# Altium PCB dual_tone.PcbDoc
Units mm, origin at the board's own origin, x right, y up, seen from the top; angles counter-clockwise.
Board outline 63 x 36.01 mm, 2 copper layers (Top Layer, Bottom Layer); 26 components, 14 nets, 61 pads, 0 vias.
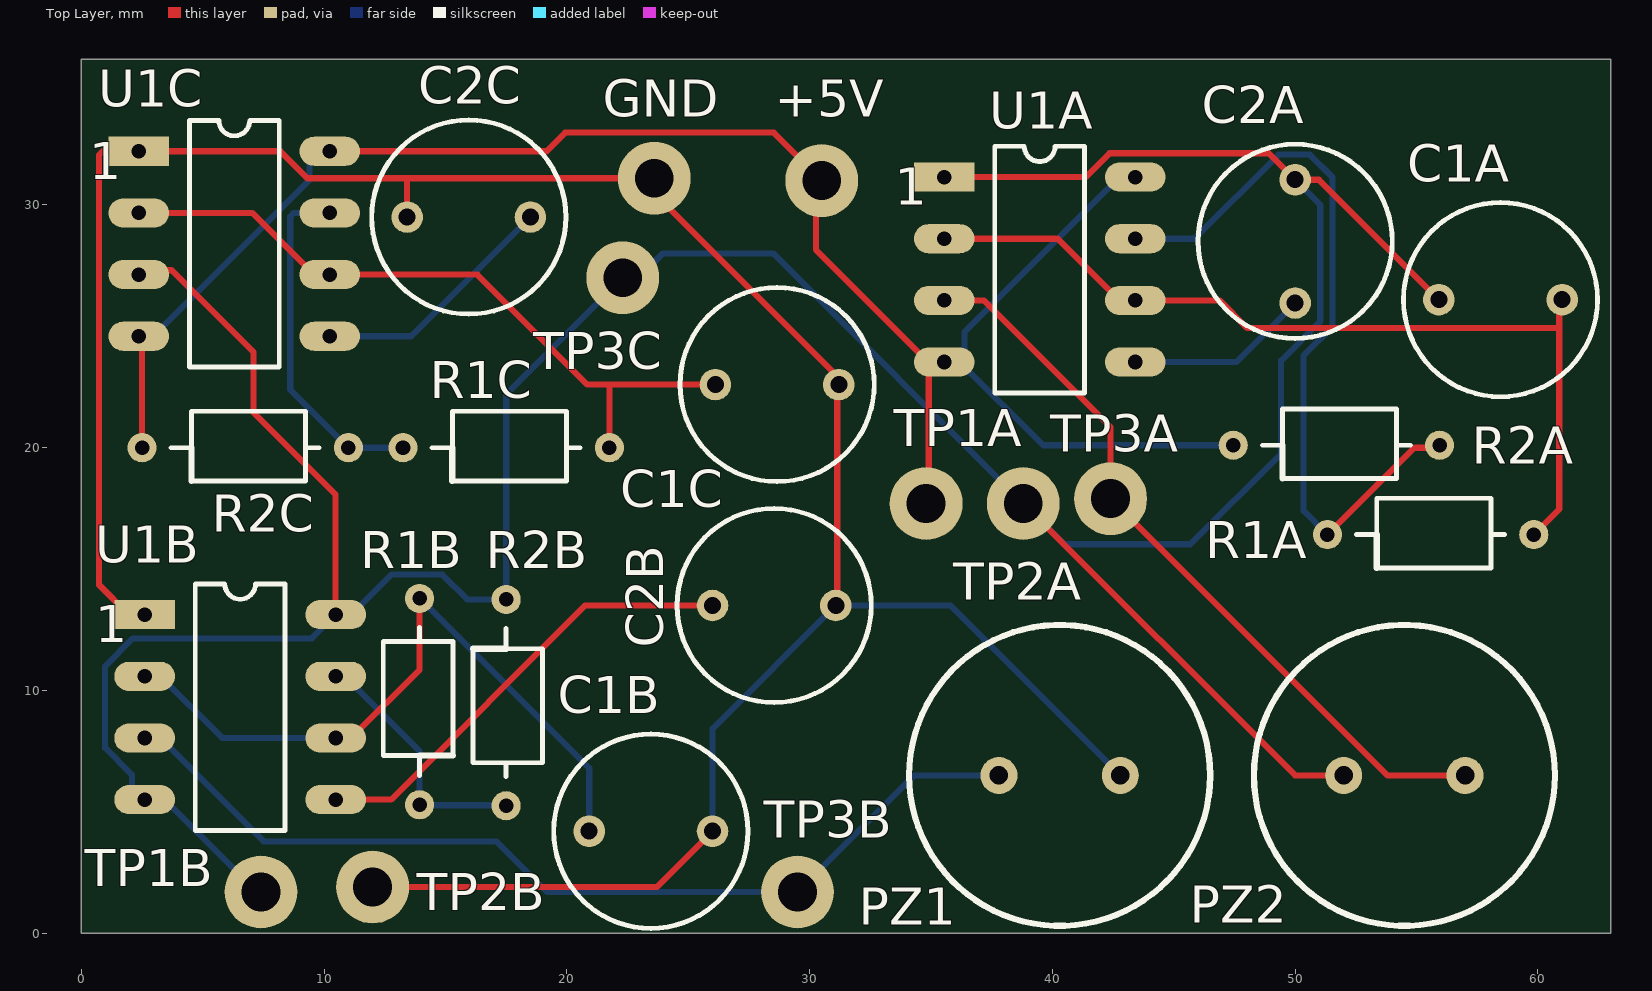
[diagram p0: Top Layer view]
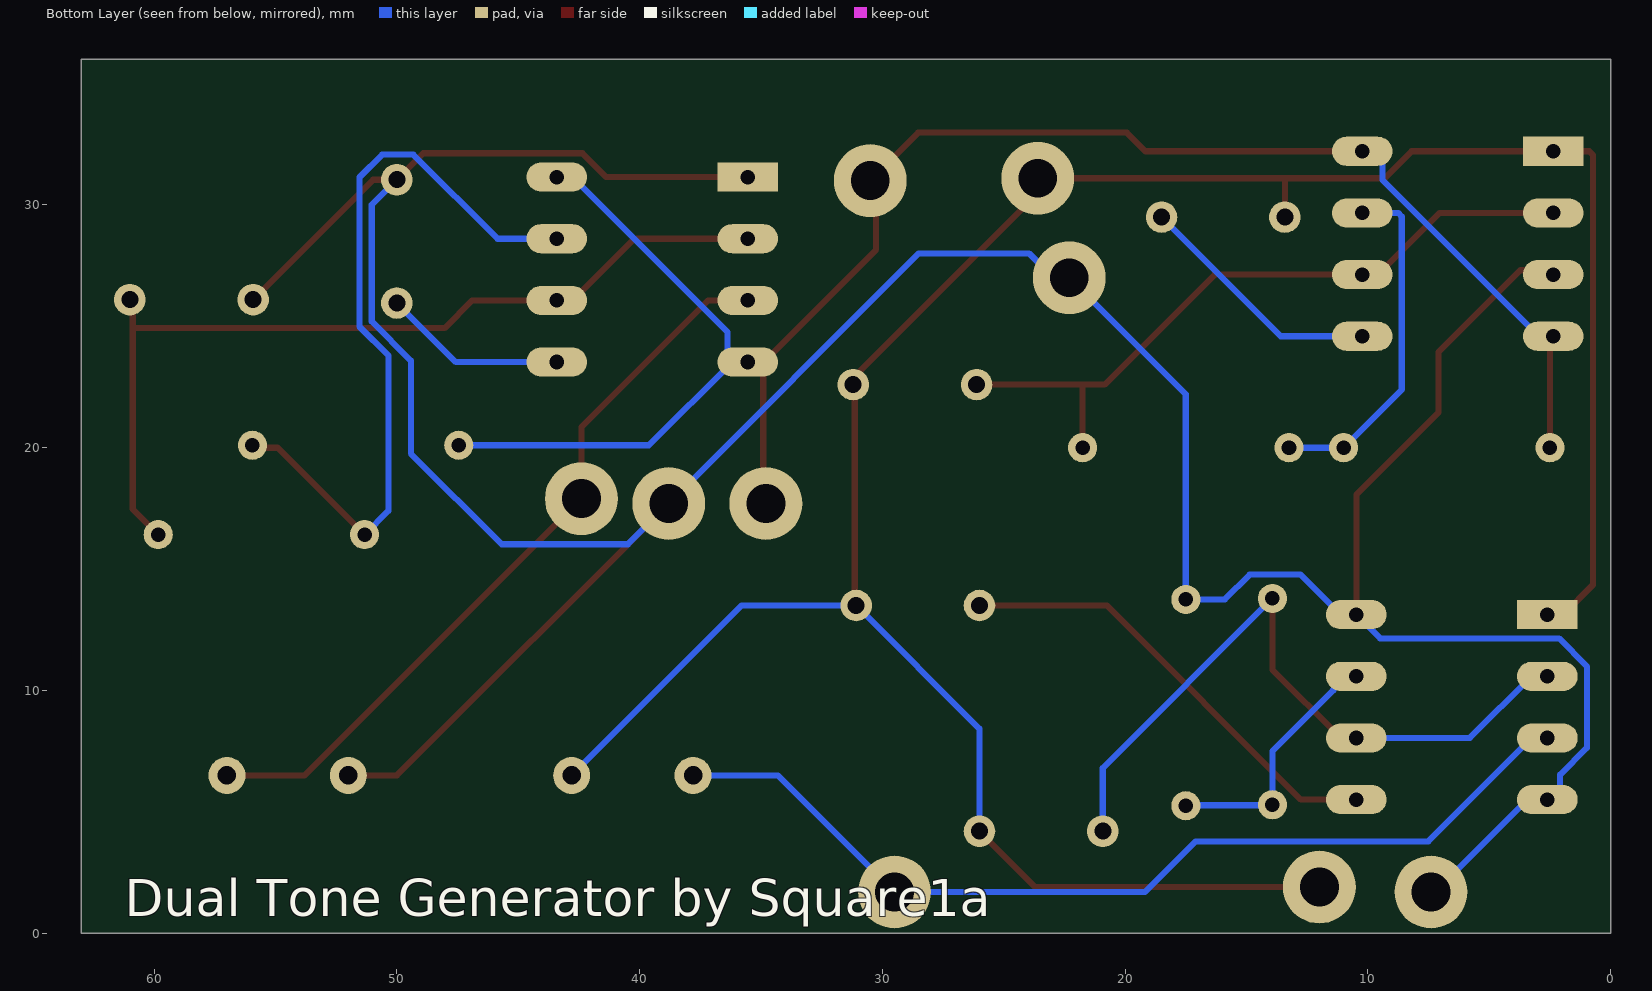
[diagram p1: Bottom Layer view, seen from below]

## Layer stack, top to bottom
Top Solder: solder mask 0.0102, Solder Resist, Dk 3.5
Top Layer: signal copper 0.0356
Dielectric 1: dielectric 0.32, FR-4, Dk 4.8
Bottom Layer: signal copper 0.0356
Bottom Solder: solder mask 0.0102, Solder Resist, Dk 3.5

## Board outline
-0.003,-0.01 63,-0.01 63,36 -0.003,36

## Design rules (kind name [scope] priority, off if disabled: settings)
Clearance [All] p1: gap=0.254 ignorepadtopadclearanceinfootprint=FALSE except(0: Arc-Hole Track-Hole SMDPad-Hole THPad-Hole Via-Hole Fill-Hole Poly-Hole Region-Hole Text-Hole)
HoleSize [All] p1: absolutevalues=TRUE maxlimit=2.54 minlimit=0.3 maxpercent=80.000 minpercent=20.000
PolygonConnect [All] p1: connectstyle=Relief reliefconductorwidth=0.254 reliefentries=4 polygonreliefangle="90 Angle" airgapwidth=0.254
RoomDefinition "U_555 timer2" [InComponentClass('U_555 timer2')] p1: confinementstyle=ConfineIn formatcopy=TRUE lockcomponents=FALSE outline 0.3,0 33,0 33,18 0.3,18
RoomDefinition "U_555 timer1" [InComponentClass('U_555 timer1')] p2: confinementstyle=ConfineIn formatcopy=TRUE lockcomponents=FALSE outline 33.081,14.341 63,14.341 63,35.9 33.081,35.9
RoomDefinition "U_555 timer3" [InComponentClass('U_555 timer3')] p3: confinementstyle=ConfineIn formatcopy=TRUE lockcomponents=FALSE outline 0,18 32.922,18 32.922,35.9 0,35.9
RoomDefinition Dual_tone_generator [InComponentClass('Dual_tone_generator')] p4: confinementstyle=ConfineIn formatcopy=TRUE lockcomponents=FALSE outline 33,0 63,0 63,14.5 33,14.5
RoutingVias [All] p1: holewidth=0.711 width=1.27 viastyle="Through Hole" minholewidth=0.711 minwidth=1.27 maxholewidth=0.711 maxwidth=1.27
SolderMaskExpansion [All] p1: expansion=0.102 istentingtop=FALSE
Width [All] p1: maxlimit=0.254 minlimit=0.254 preferedwidth=0.254
29 further rules are at their usual default settings.

## Classes and differential pairs
channel class 555_Timer: "U_555 timer1" "U_555 timer2" "U_555 timer3"
component class "U_555 timer3": +5V C1C C2C GND R1C R2C TP3C U1C
component class "U_555 timer2": C1B C2B R1B R2B TP1B TP2B TP3B U1B
component class "U_555 timer1": C1A C2A R1A R2A TP1A TP2A TP3A U1A
component class Dual_tone_generator: PZ1 PZ2

## Components (designator, comment, footprint, x,y, rotation, side; value= is the part's Value field where it differs from the comment)
+5V "(POS)" TEST_POINT 30.5,31 r0 top (schematic designator TP1)
C1A "10nF" CAPACITOR 58.46,26.1 r0 top (schematic designator C1)
C1B "10nF" CAPACITOR 23.46,4.2 r180 top (schematic designator C1)
C1C "10nF" CAPACITOR 28.66,22.6 r180 top (schematic designator C1)
C2A "0.1uF" CAPACITOR 50,28.5 r270 top (schematic designator C2)
C2B "0.1uF" CAPACITOR 28.54,13.5 r180 top (schematic designator C2)
C2C "0.1uF" CAPACITOR 15.96,29.5 r0 top (schematic designator C2)
GND "(NEG)" TEST_POINT 23.6,31.1 r0 top (schematic designator TP2)
PZ1 "Piezo Buzzer" Buzzer 40.3,6.5 r0 top
PZ2 "Piezo Buzzer" Buzzer 54.5,6.5 r180 top
R1A "1kΩ" "Through hole resistor" 55.581,16.419 r0 top (schematic designator R1)
R1B "1kΩ" "Through hole resistor" 13.934,9.54 r90 top (schematic designator R1)
R1C "1kΩ" "Through hole resistor" 17.5,20 r0 top (schematic designator R1)
R2A "1.8kΩ" "Through hole resistor" 51.7,20.1 r0 top (schematic designator R2)
R2B "1.8kΩ" "Through hole resistor" 17.5,9.5 r270 top (schematic designator R2)
R2C "1.8kΩ" "Through hole resistor" 6.75,20 r0 top (schematic designator R2)
TP1A "(POS)" TEST_POINT 34.8,17.7 r0 top (schematic designator TP1)
TP1B "(POS)" TEST_POINT 7.4,1.7 r90 top (schematic designator TP1)
TP2A "(NEG)" TEST_POINT 38.8,17.7 r0 top (schematic designator TP2)
TP2B "(NEG)" TEST_POINT 12,1.9 r90 top (schematic designator TP2)
TP3A "(VOUT)" TEST_POINT 42.4,17.9 r0 top (schematic designator TP3)
TP3B "(VOUT)" TEST_POINT 29.5,1.7 r90 top (schematic designator TP3)
TP3C "(VOUT)" TEST_POINT 22.3,27 r0 top (schematic designator TP3)
U1A "555 timer" DIP8 39.479,27.339 r0 top (schematic designator U1)
U1B "555 timer" DIP8 6.541,9.312 r0 top (schematic designator U1)
U1C "555 timer" DIP8 6.3,28.4 r0 top (schematic designator U1)

## Footprints (in the part's own frame and the unit in brackets; to place one, negate y for a bottom-side part, rotate by r counter-clockwise, add the part's x,y. Pads: shape width x height; smd on the part's side, far side on the other; paste and mask are expansions set on the pad)
Buzzer [mil]
  round 60 hole 30: 1(-98.43,0) 2(98.43,0)
  silkscreen extent -244,-244 244,244
CAPACITOR [mm]
  round 1.3 hole 0.7: 1(-2.54,0) 2(2.54,0)
  silkscreen extent -4,-4 4,4
DIP8 [mm]
  rect 2.5x1.2 hole 0.6: 1(-3.935,3.81)
  oval 2.5x1.2 hole 0.6: 2(-3.935,1.27) 3(-3.935,-1.27) 4(-3.935,-3.81) 5(3.935,-3.81) 6(3.935,-1.27) 7(3.935,1.27) 8(3.935,3.81)
  silkscreen extent -1.85,-5.08 1.85,5.08
TEST_POINT [mm]
  round 3 hole 1.6: 1(0,0)
"Through hole resistor" [mm]
  round 1.2 hole 0.6: 1(-4.25,0) 2(4.25,0)
  silkscreen extent -3.05,-1.37 3.05,1.5

## Part data
+5V TP1A TP1B: library part 5010, "Polyurethane Multi-Purpose Cream Adhesive, 10.3 oz Cartridge", Color=Red, Flammability Rating="UL94 V-0", Manufacturer="Keystone Electronics", Package Quantity=100, Supplier Part Number 1=36-5010-ND, Body Material=Bronze,PBT, Category=Connectors, ComponentLink1Description=https://datasheet.ciiva.com/11744/0900766b8009b7c7-11744920.pdf?src-supplier=RSComponents, ComponentLink1URL=https://datasheet.ciiva.com/11744/0900766b8009b7c7-11744920.pdf?src-supplier=RSComponents, ComponentLink2Description=https://datasheet.ciiva.com/16506/m60-2p60-16506972.pdf?src-supplier=Future+Electronics, ComponentLink2URL=https://datasheet.ciiva.com/16506/m60-2p60-16506972.pdf?src-supplier=Future+Electronics, ComponentLink3Description=https://datasheet.ciiva.com/16883/70182825-16883886.pdf?src-supplier=Allied+Electronics, ComponentLink3URL=https://datasheet.ciiva.com/16883/70182825-16883886.pdf?src-supplier=Allied+Electronics, ComponentLink4Description=https://datasheet.ciiva.com/1454/1703983-1454833.pdf?src-supplier=Element14, ComponentLink4URL=https://datasheet.ciiva.com/1454/1703983-1454833.pdf?src-supplier=Element14, ComponentLink5Description=https://datasheet.ciiva.com/22631/1703983-22631113.pdf?src-supplier=Element14, ComponentLink5URL=https://datasheet.ciiva.com/22631/1703983-22631113.pdf?src-supplier=Element14, ComponentLink6Description=https://datasheet.ciiva.com/2917/5010-2917626.pdf?src-supplier=Digi-Key, ComponentLink6URL=https://datasheet.ciiva.com/2917/5010-2917626.pdf?src-supplier=Digi-Key, Contact Material=Bronze, Contact Plating=Silver,Tin, Height=0.445inch, Hole Diameter=1.6mm, Housing Color=Red, Inside Diameter=1.78mm, Insulation Material=Nylon, Lead Free="Lead Free", Length=11.3mm, Manufacturer Part Number=5010, Material=Nylon,Bronze,Silver, Mount="Through Hole,PCB", Number of Ports=1, Orientation=Straight, Packaging=Bulk, Plating=Silver, Pricing 1="1=0.42000, 25=0.34080, 100=0.30150, 250=0.28304, 500=0.25230, 1000=0.19884, 2500=0.18180, 5000=0.17044 (USD)", REACH SVHC="No SVHC", RoHS=Yes, RoHS Compliant=Yes, Series=THM, Stock 1=546313, Supplier 1=Digi-Key, Termination="Through Hole"
C1A C1B C1C: library part C0603X103K1RAC3316, "Cap Ceramic 0.01uF 100V X7R 10% SMD 0603 125°C Paper T/R", Case Code (Imperial)=0603, Case Code (Metric)=1608, Dielectric=X7R, Manufacturer=KEMET, Max Operating Temperature=125°C, Min Operating Temperature=-55°C, Supplier Part Number 1=1881957, Tolerance=10%, Voltage Rating=100V, Capacitance=10nF, Category="Ceramic Capacitors", ComponentLink1Description=http://www.farnell.com/datasheets/2821142.pdf?src-supplier=Farnell, ComponentLink1URL=http://www.farnell.com/datasheets/2821142.pdf?src-supplier=Farnell, ComponentLink2Description=http://www.farnell.com/datasheets/2163236.pdf?src-supplier=Element14, ComponentLink2URL=http://www.farnell.com/datasheets/2163236.pdf?src-supplier=Element14, Manufacturer Part Number=C0603X103K1RAC3316, Packaging="Cut Tape", Pricing 1="4000=0.07200, 16000=0.07100 (GBP)", REACH SVHC="No SVHC", RoHS=Yes, RoHS Compliant=Yes, Stock 1=200, Supplier 1=RSComponents, Voltage Rating (DC)=100V
C2A C2B C2C: library part 885012208009, "Cap, 0.1ΜF, 10V, 10%, X7R, 1206", Capacitance=100nF, Case Code (Imperial)=1206, Case Code (Metric)=3216, Manufacturer="Wurth Electronics", Max Operating Temperature=125°C, Min Operating Temperature=-55°C, Supplier Part Number 1=732-8086-1-ND, Tolerance=10%, Voltage Rating=10V, Case/Package=1206, Category="Ceramic Capacitors", ComponentLink1Description=http://www.farnell.com/datasheets/2031891.pdf?src-supplier=Farnell, ComponentLink1URL=http://www.farnell.com/datasheets/2031891.pdf?src-supplier=Farnell, ComponentLink2Description=http://katalog.we-online.de/pbs/datasheet/885012208009.pdf?src-supplier=Digi-Key, ComponentLink2URL=http://katalog.we-online.de/pbs/datasheet/885012208009.pdf?src-supplier=Digi-Key, ComponentLink3Description=https://katalog.we-online.de/pbs/datasheet/885012208009.pdf?src-supplier=Digi-Key, ComponentLink3URL=https://katalog.we-online.de/pbs/datasheet/885012208009.pdf?src-supplier=Digi-Key, Length=0.126inch, Manufacturer Part Number=885012208009, Mount="Surface Mount", Packaging="Tape and Reel", Pricing 1="1=0.12000, 10=0.10600, 100=0.09500, 500=0.08300 (USD)", RoHS=Yes, RoHS Compliant=Yes, Stock 1=5980, Supplier 1=Digi-Key, Thickness=0.035inch, Width=0.063inch
GND TP2A TP2B: library part 5011, "Test Point MultiPurpose THM H .445 Nylon 46 Insulated Blk PhosBronze/Silver", Color=Black, Flammability Rating="UL94 V-0", Manufacturer="Keystone Electronics", Package Quantity=100, Supplier Part Number 1=2042652, Body Material=PBT, Category=Connectors, ComponentLink1Description=https://datasheet.ciiva.com/11744/0900766b8009b7c7-11744935.pdf?src-supplier=RSComponents, ComponentLink1URL=https://datasheet.ciiva.com/11744/0900766b8009b7c7-11744935.pdf?src-supplier=RSComponents, ComponentLink2Description=https://datasheet.ciiva.com/1454/1718230-1454834.pdf?src-supplier=Element14, ComponentLink2URL=https://datasheet.ciiva.com/1454/1718230-1454834.pdf?src-supplier=Element14, ComponentLink3Description=https://datasheet.ciiva.com/16351/m60-2p60-16351093.pdf?src-supplier=Future+Electronics, ComponentLink3URL=https://datasheet.ciiva.com/16351/m60-2p60-16351093.pdf?src-supplier=Future+Electronics, ComponentLink4Description=https://datasheet.ciiva.com/2917/5011-2917635.pdf?src-supplier=Digi-Key, ComponentLink4URL=https://datasheet.ciiva.com/2917/5011-2917635.pdf?src-supplier=Digi-Key, ComponentLink5Description=https://datasheet.ciiva.com/46412/1703983-46412138.pdf?src-supplier=Element14, ComponentLink5URL=https://datasheet.ciiva.com/46412/1703983-46412138.pdf?src-supplier=Element14, Contact Material=Bronze, Contact Plating=Silver,Tin, Gender=Female, Hole Diameter=1.6mm, Housing Color=Black, Inside Diameter=1.78mm, Lead Free="Lead Free", Length=11.3mm, Manufacturer Part Number=5011, Material=Nylon,Bronze,Silver, Mount="PCB,Through Hole", Number of Ports=1, Orientation=Straight, Packaging=Bulk, Pricing 1="100=0.30800, 500=0.29900, 1000=0.29100, 4000=0.28400 (GBP)", REACH SVHC="No SVHC", RoHS=Yes, RoHS Compliant=Yes, Series=THM, Stock 1=100, Supplier 1=RSComponents
PZ1 PZ2: library part TP124005-2, "High Temp Piezo Transducer; Resonant Frequency: 4000Hz; Rated Voltage: 5V; SPL @ 10cm: 75dBA", Manufacturer="DB Unlimited", Supplier Part Number 1=2104-TP124005-2CT-ND, Category="Audio Products", Manufacturer Part Number=TP124005-2, Pricing 1="1=0.78000, 10=0.64900, 25=0.60120, 50=0.56620, 100=0.53260 (USD)", RoHS=No, Stock 1=2115, Supplier 1=Digi-Key
R1A R1B R1C: library part SFR2500001001JA500, "Res Metal Film 1K Ohm 5% 2/5W ±100ppm/°C Conformal AXL Thru-Hole Ammo Pack", Case/Package=Conformal, Manufacturer="Vishay BCcomponents", Max Operating Temperature=155°C, Max Power Dissipation=400mW, Min Operating Temperature=-55°C, Resistance=1kR, Resistance Tolerance=5%, Resistor Type="Metal Film", Temperature Coefficient=100ppm/°C, Voltage Rating=250V, Category="Through-Hole Resistors", ComponentLink1Description=https://datasheet.ciiva.com/8323/sfr16s25-8323400.pdf?src-supplier=Avnet, ComponentLink1URL=https://datasheet.ciiva.com/8323/sfr16s25-8323400.pdf?src-supplier=Avnet, Construction=Cylindrical, Contact Plating=Tin, Diameter=2.5mm, Lead Diameter=0.58mm, Lead Length=26mm, Length=7.5mm, Manufacturer Part Number=SFR2500001001JA500, Military Standard=Not, Number of Terminations=2, Packaging="Tape and Reel", Power Rating=400mW, Pricing 1="1=0.17130, 10=0.13160, 25=0.10310, 100=0.04400, 250=0.03870, 500=0.03240, 1000=0.02600 (USD)", Radiation Hardening=No, REACH SVHC=Unknown, RoHS=Yes, RoHS Compliant=Yes, Series=SFR25, Stock 1=1000, Supplier 1="Arrow Electronics", Supplier Part Number 1=SFR2500001001JA500, Termination=Axial, Tolerance=5%
R2A R2B R2C: library part MFR-25FTE52-1K8, "General Type Metal Film Resistor 1.8kOhm 1/4W 1% Axial Ammo Pack", Case/Package=Conformal, Manufacturer=Yageo, Max Operating Temperature=155°C, Min Operating Temperature=-55°C, Power Rating=250mW, Resistance=1.8kR, Resistor Type="Metal Film", Supplier Part Number 1=1997607, Tolerance=1%, Voltage Rating=250V, Category=Resistors, ComponentLink1Description=http://www.mouser.com/ds/2/447/Yageo%20LR_MFR_2013-467719.pdf?src-supplier=Mouser, ComponentLink1URL=http://www.mouser.com/ds/2/447/Yageo%20LR_MFR_2013-467719.pdf?src-supplier=Mouser, ComponentLink2Description=http://www.yageo.com/NewPortal/yageodocoutput?fileName=/pdf/throughhole/Yageo_LR_MFR_2013.pdf&src-supplier=Digi-Key, ComponentLink2URL=http://www.yageo.com/NewPortal/yageodocoutput?fileName=/pdf/throughhole/Yageo_LR_MFR_2013.pdf&src-supplier=Digi-Key, ComponentLink3Description=https://datasheet.octopart.com/MFR-25FTE52-1K8-Yageo-datasheet-155367622.pdf?src-supplier=Future+Electronics, ComponentLink3URL=https://datasheet.octopart.com/MFR-25FTE52-1K8-Yageo-datasheet-155367622.pdf?src-supplier=Future+Electronics, ComponentLink4Description=https://datasheet.octopart.com/MFR-25FTE52-1K8-Yageo-datasheet-28066692.pdf, ComponentLink4URL=https://datasheet.octopart.com/MFR-25FTE52-1K8-Yageo-datasheet-28066692.pdf, Construction=Cylindrical, Length=6.3mm, Manufacturer Part Number=MFR-25FTE52-1K8, Military Standard=Not, Mount="Through Hole", Pricing 1="5000=0.00800 (GBP)", Stock 1=5000, Supplier 1=RSComponents, Termination=Axial
TP3A TP3B TP3C: library part 5014, "Test Point MultiPurpose THM H .445 Nylon 46 Insulated Yel PhosBronze/Silver", Color=Yellow, Flammability Rating="UL94 V-0", Manufacturer="Keystone Electronics", Package Quantity=100, Supplier Part Number 1=62W5146, Body Material=PBT, Category=Connectors, ComponentLink1Description=https://datasheet.ciiva.com/2917/5014-2917636.pdf?src-supplier=Digi-Key, ComponentLink1URL=https://datasheet.ciiva.com/2917/5014-2917636.pdf?src-supplier=Digi-Key, ComponentLink2Description=https://datasheet.ciiva.com/16297/m60-2p60-16297225.pdf?src-supplier=Future+Electronics, ComponentLink2URL=https://datasheet.ciiva.com/16297/m60-2p60-16297225.pdf?src-supplier=Future+Electronics, ComponentLink3Description=https://datasheet.ciiva.com/22631/1703983-22631119.pdf?src-supplier=Element14, ComponentLink3URL=https://datasheet.ciiva.com/22631/1703983-22631119.pdf?src-supplier=Element14, ComponentLink4Description=https://datasheet.ciiva.com/16884/70182825-16884159.pdf?src-supplier=Allied+Electronics, ComponentLink4URL=https://datasheet.ciiva.com/16884/70182825-16884159.pdf?src-supplier=Allied+Electronics, Contact Material=Bronze, Contact Plating=Silver,Tin, Height=0.445inch, Inside Diameter=1.78mm, Lead Free="Lead Free", Length=11.3mm, Manufacturer Part Number=5014, Material=Nylon,Bronze,Silver, Mount="Through Hole,PCB", Packaging=Bulk, Pricing 1="1=0.26400, 10=0.25400, 100=0.24000, 500=0.17900, 1000=0.15400, 2500=0.13300, 10000=0.11100 (USD)", REACH SVHC="No SVHC", RoHS=Yes, RoHS Compliant=Yes, Series=THM, Stock 1=46110, Supplier 1=Newark, Termination="Through Hole"
U1A U1B U1C: library part NE555P, "IC OSC SINGLE TIMER 100KHZ 8-DIP", Case/Package=PDIP, Current Rating=10mA, Frequency=500kHz, High Level Output Current=-200mA, Low Level Output Current=200mA, Manufacturer="Texas Instruments", Max Operating Temperature=70°C, Max Supply Voltage=16V, Min Operating Temperature=0°C, Min Supply Voltage=4.5V, Nominal Supply Current=2mA, Operating Supply Voltage=5V, Package Quantity=50, Quiescent Current=15mA, Supplier Part Number 1=296-NE555P-ND, Category="Clock and Timing", ComponentLink1Description=https://datasheet.ciiva.com/19457/904085-19457361.pdf?src-supplier=Jameco, ComponentLink1URL=https://datasheet.ciiva.com/19457/904085-19457361.pdf?src-supplier=Jameco, ComponentLink2Description=https://datasheet.ciiva.com/1139/sa555-1139904.pdf?src-supplier=Element14, ComponentLink2URL=https://datasheet.ciiva.com/1139/sa555-1139904.pdf?src-supplier=Element14, ComponentLink3Description=https://datasheet.ciiva.com/26325/152184-da-01-en-ne555p-timer-tid-26325915.pdf?src-supplier=Conrad, ComponentLink3URL=https://datasheet.ciiva.com/26325/152184-da-01-en-ne555p-timer-tid-26325915.pdf?src-supplier=Conrad, ComponentLink4Description=https://datasheet.ciiva.com/14094/ne555-series-eng-tds-14094950.pdf?src-supplier=Distrelec, ComponentLink4URL=https://datasheet.ciiva.com/14094/ne555-series-eng-tds-14094950.pdf?src-supplier=Distrelec, ComponentLink5Description=https://datasheet.ciiva.com/1233/ne555-1233454.pdf?src-supplier=Digi-Key, ComponentLink5URL=https://datasheet.ciiva.com/1233/ne555-1233454.pdf?src-supplier=Digi-Key, ComponentLink6Description=https://datasheet.ciiva.com/1147/1764032-1147750.pdf?src-supplier=Newark, ComponentLink6URL=https://datasheet.ciiva.com/1147/1764032-1147750.pdf?src-supplier=Newark, ComponentLink7Description=https://datasheet.ciiva.com/14274/ne555-14274456.pdf?src-supplier=Avnet, ComponentLink7URL=https://datasheet.ciiva.com/14274/ne555-14274456.pdf?src-supplier=Avnet, ComponentLink8Description=https://datasheet.ciiva.com/15152/getdatasheetpartid-248510-15152620.pdf?src-supplier=Verical, ComponentLink8URL=https://datasheet.ciiva.com/15152/getdatasheetpartid-248510-15152620.pdf?src-supplier=Verical, Contact Plating=Gold, Height=4.57mm, Lead Free="Lead Free", Length=9.81mm, Manufacturer Part Number=NE555P, Mount="Through Hole", Number of Pins=8, Number of Timers/Counters=1, Operating Supply Current=10mA, Packaging=Rail/Tube, Pricing 1="1=0.48000, 10=0.41300, 25=0.38600, 100=0.30870, 250=0.28664, 500=0.24252, 1000=0.18741, 2500=0.17087, 5000=0.16640 (USD)", Radiation Hardening=No, REACH SVHC="No SVHC", RoHS=Yes, RoHS Compliant=Yes, Stock 1=8993, Supplier 1=Digi-Key, Weight=0.015535oz, Width=6.35mm

## Nets (pads, with @x,y where several pads share a name; then routed paths per layer and width w, separated by ;. In a path a pad name is that pad's centre, name@x,y a point inside that pad or via, vN(x,y) a via of type N, cw(c..) or ccw(c..) an arc to the next point about the centre after c; other vN are vias at no path point)
NEGA: C1A.1 C2A.1 PZ2.2 R2B.1 TP1B.1 TP2A.1 TP3C.1 U1A.1 U1B.4 U1B.8 U1C.3 | length 152.9
  Top Layer w0.254: U1C.3 2.546,27.311 3.703,27.311 3.712,27.32 7.094,23.938 7.094,21.448 10.476,18.066 U1B.8 ; TP3C.1@22.3,26.395 TP3C.1 ; U1A.1 41.376,31.149 42.357,32.13 48.91,32.13 C2A.1 50.98,31.04 C1A.1 ; TP2A.1 50,6.5 PZ2.2
  Bottom Layer w0.254: TP1B.1 7.229,1.7 3.427,5.502 2.52,5.502 2.083,5.939 2.083,6.528 0.975,7.636 0.975,10.988 2.127,12.141 9.495,12.141 U1B.8 11.126,13.122 12.775,14.771 14.875,14.771 15.896,13.75 R2B.1 17.5,22.2 TP3C.1 22.96,27 23.96,28 28.5,28 TP2A.1 40.481,16.019 45.679,16.019 49.418,19.758 49.418,23.589 51.031,25.201 51.031,30.009 C2A.1
NEGB: C1B.1 C1C.1 C2B.1 C2C.1 GND.1 PZ1.2 TP2B.1 U1B.1 U1C.1 | length 108.4
  Top Layer w0.254: U1B.1@3.278,13.595 2.805,13.122 U1B.1 1.956,13.122 0.734,14.344 0.734,32.061 0.883,32.21 U1C.1 8.198,32.21 9.308,31.1 13.4,31.1 ; TP2B.1@11.475,2.125 11.775,1.825 11.85,1.9 TP2B.1 23.7,1.9 C1B.1 ; C2C.1 13.42,31.08 13.4,31.1 ; C2B.1 31.14,13.56 31.14,22.54 C1C.1 31.2,22.883 23.6,30.483 GND.1 13.4,31.1
  Bottom Layer w0.254: C1B.1 26,8.42 C2B.1 35.8,13.5 PZ1.2
NetC2A_2: C2A.2 U1A.5 | length 7.6
  Bottom Layer w0.254: U1A.5 47.569,23.529 C2A.2
NetC2B_2: C2B.2 U1B.5 | length 18.8
  Top Layer w0.254: U1B.5 12.758,5.502 20.756,13.5 C2B.2
NetC2C_2: C2C.2 U1C.5 | length 10.3
  Bottom Layer w0.254: U1C.5 13.59,24.59 C2C.2
NetR1A_1: R1A.1 R2A.2 U1A.7 | length 31.7
  Top Layer w0.254: R1A.1 54.912,20 55.85,20 R2A.2
  Bottom Layer w0.254: U1A.7 45.854,28.609 49.316,32.071 50.605,32.071 51.539,31.137 51.539,24.991 50.35,23.802 50.35,17.4 R1A.1
NetR1B_1: R1B.1 R2B.2 U1B.7 | length 10.5
  Bottom Layer w0.254: U1B.7 10.87,10.582 11.426,10.026 11.426,10.003 13.934,7.495 R1B.1 13.954,5.27 17.48,5.27 R2B.2
NetR1C_1: R1C.1 R2C.2 U1C.7 | length 14.5
  Bottom Layer w0.254: U1C.7 8.753,29.67 8.604,29.521 8.604,22.396 R2C.2 R1C.1
POSA: +5V.1 R2A.1 R2C.1 TP1A.1 U1A.4 U1A.8 U1C.4 U1C.8 | length 77.8
  Top Layer w0.254: U1C.4 2.5,24.455 R2C.1 ; U1C.8 19.163,32.21 19.934,32.981 28.519,32.981 +5V.1 30.26,31 30.26,28.163 34.894,23.529 U1A.4@35.518,23.529 ; TP1A.1 34.91,17.81 34.91,23.092 35.081,23.092 U1A.4@35.518,23.529 ; U1A.4 U1A.4@35.518,23.529
  Bottom Layer w0.254: U1C.4 2.954,24.59 9.404,31.04 9.404,31.773 9.841,32.21 U1C.8 ; U1A.4 U1A.4@35.938,23.529 ; U1A.8@42.764,31.149 36.375,24.76 36.375,23.966 U1A.4@35.938,23.529 ; R2A.1 39.622,20.1 36.194,23.529 U1A.4@35.938,23.529
THRESA: C1A.2 R1A.2 U1A.2 U1A.6 | length 37.2
  Top Layer w0.254: U1A.2 40.224,28.609 42.764,26.069 U1A.6 46.894,26.069 48.034,24.929 60.81,24.929 60.881,25 ; R1A.2 60.881,17.469 60.881,25 ; C1A.2 60.7,25.8 60.881,25.619 60.881,25
THRESB: C1B.2 R1B.2 U1B.2 U1B.6 | length 29
  Top Layer w0.254: U1B.6 11.126,8.042 13.934,10.85 R1B.2
  Bottom Layer w0.254: U1B.2 3.256,10.582 5.796,8.042 U1B.6 ; R1B.2 20.92,6.804 C1B.2
THRESC: C1C.2 R1C.2 U1C.2 U1C.6 | length 30
  Top Layer w0.254: U1C.2 7.045,29.67 U1C.6@9.585,27.13 ; U1C.6 U1C.6@9.585,27.13 ; R1C.2@21.835,20 R1C.2 21.75,22.55 21.7,22.6 ; 24.335,22.6 21.7,22.6 ; 24.42,22.6 C1C.2 ; U1C.6@9.585,27.13 16.314,27.13 20.844,22.6 21.7,22.6
VOUTA: PZ2.1 TP3A.1 U1A.3 | length 31.3
  Top Layer w0.254: U1A.3 37.175,26.069 42.4,20.843 TP3A.1 53.8,6.5 PZ2.1
VOUTB: PZ1.1 TP3B.1 U1B.3 | length 39.8
  Bottom Layer w0.254: U1B.3 3.256,8.042 7.517,3.781 17.096,3.781 19.177,1.7 TP3B.1 ; TP3B.1@29.6,1.7 29.6,1.8 34.3,6.5 PZ1.1

## Silkscreen, mask and mechanical layers (free items; w line width, h text height)
Bottom Overlay:
  text "Dual Tone Generator by Square1a" at 61.2,0.7 h1.52
Mechanical 1:
  lines w0.001: -0.003,-0.01 -0.003,36 ; -0.003,-0.01 63,-0.01 ; -0.003,-0.01 -0.003,36 ; -0.003,-0.01 63,-0.01 ; -0.003,36 63,36 ; -0.003,36 63,36 ; 63,-0.01 63,36 ; 63,-0.01 63,36

## Text inside footprints (layer, text, board x,y; h text height)
U1A: Top Overlay "1" at 33.512,30.006 h1.52
U1B: Top Overlay "1" at 0.574,11.979 h1.52
U1C: Top Overlay "1" at 0.333,31.067 h1.52